# EAGLE board Cowbell (EAGLE 9.3.1)
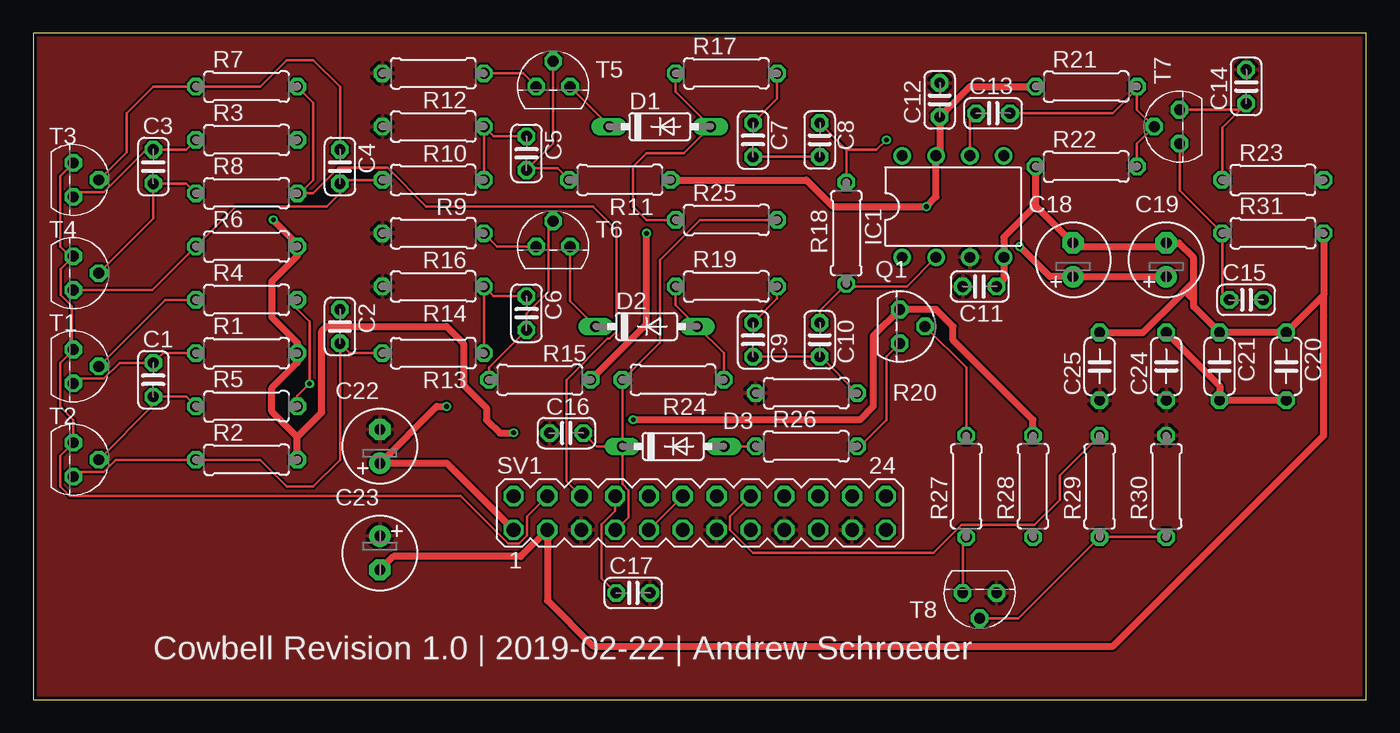
[diagram p0: board, top side]
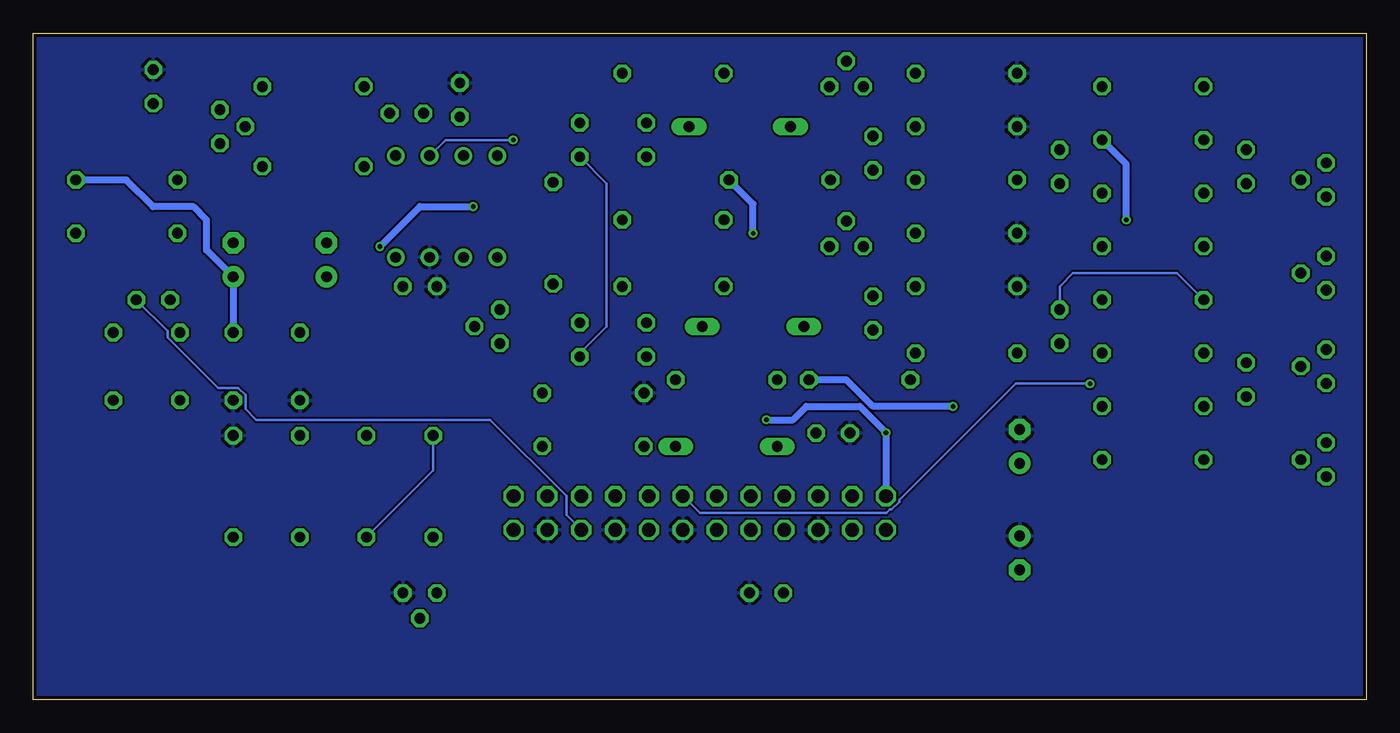
[diagram p1: board, bottom side, seen from below]

Size 100 x 50 mm. Coordinates in mm from the lower left corner, seen from the top.
Outline: 0,0 100,0 100,50 0,50 0,0
Copper layers (1*16): Top 0.035mm / dielectric 1.5mm / Bottom 0.035mm
Design rules "SeeedStudio_2layer_DRU_no_angle_20140221": minimum track width 6mil, minimum drill 12mil, track to track 6mil, track to pad 6mil, pad to pad 6mil, via to via 6mil, smd to smd 0mil, copper to edge 10mil, drill to drill 10mil, minimum pad ring 10mil, minimum via ring 6mil, stop-mask expansion 2mil, vias tented up to drill 100mil, thermal gap 10mil

## Footprints (pad centres in the part's own frame; a part is rotated, then mirrored left to right if it is on the bottom)
C025-024X044 = drill 0.813 octagon: 1 -1.27,0; 2 1.27,0
E2,5-6 = drill 0.813 pad 1.6: + -1.27,0 | drill 0.813 pad 1.6 octagon: - 1.27,0
C050-024X044 = drill 0.813 octagon: 1 -2.54,0; 2 2.54,0
DO35-7 = drill 0.813 long: A 3.81,0; C -3.81,0
DIL08 = drill 0.813 pad 1.27: 1 -3.81,-3.81; 2 -1.27,-3.81; 3 1.27,-3.81; 4 3.81,-3.81; 5 3.81,3.81; 6 1.27,3.81; 7 -1.27,3.81; 8 -3.81,3.81
TO92 = drill 0.813 octagon: 1 1.27,0; 2 0,1.905; 3 -1.27,0
0207/7 = drill 0.813 octagon: 1 -3.81,0; 2 3.81,0
MA12-2 = drill 1.016 octagon: 1 -13.97,-1.27; 2 -13.97,1.27; 3 -11.43,-1.27; 4 -11.43,1.27; 5 -8.89,-1.27; 6 -8.89,1.27; 7 -6.35,-1.27; 8 -6.35,1.27; 9 -3.81,-1.27; 10 -3.81,1.27; 11 -1.27,-1.27; 12 -1.27,1.27; 13 1.27,-1.27; 14 1.27,1.27; 15 3.81,-1.27; 16 3.81,1.27; 17 6.35,-1.27; 18 6.35,1.27; 19 8.89,-1.27; 20 8.89,1.27; 21 11.43,-1.27; 22 11.43,1.27; 23 13.97,-1.27; 24 13.97,1.27

## Placement (x,y rotation side)
C1  0.1u  [C025-024X044]  9,24 270 top
C2  0.1u  [C025-024X044]  23,28 270 top
C3  0.1u  [C025-024X044]  9,40 270 top
C4  0.1u  [C025-024X044]  23,40 270 top
C5  4.7u  [C025-024X044]  37,41 270 top
C6  4.7u  [C025-024X044]  37,29 270 top
C7  2.2p  [C025-024X044]  54,42 270 top
C8  3.3p  [C025-024X044]  59,42 90 top
C9  2.2p  [C025-024X044]  54,27 270 top
C10  0.01u  [C025-024X044]  59,27 90 top
C11  0.1u  [C025-024X044]  71,31 180 top
C12  0.1u  [C025-024X044]  68,45 90 top
C13  2.2u  [C025-024X044]  72,44 0 top
C14  1u  [C025-024X044]  91,46 90 top
C15  2.2u  [C025-024X044]  91,30 0 top
C16  0.47u  [C025-024X044]  40,20 180 top
C17  1u  [C025-024X044]  45,8 0 top
C18  10u  [E2,5-6]  78,33 90 top
C19  10u  [E2,5-6]  85,33 90 top
C20  0.1u  [C050-024X044]  94,25 270 top
C21  0.1u  [C050-024X044]  89,25 270 top
C22  10u  [E2,5-6]  26,19 90 top
C23  10u  [E2,5-6]  26,11 270 top
C24  0.1u  [C050-024X044]  85,25 90 top
C25  0.1u  [C050-024X044]  80,25 270 top
D1  1N4148DO35-7  [DO35-7]  47,43 0 top
D2  1N4148DO35-7  [DO35-7]  46,28 0 top
D3  1N4148DO35-7  [DO35-7]  48,19 0 top
IC1  LM741P  [DIL08]  69,37 0 top
Q1  2N3906  [TO92]  65,28 270 top
R1  470  [0207/7]  16,26 0 top
R2  470  [0207/7]  16,18 0 top
R3  470  [0207/7]  16,42 0 top
R4  12k  [0207/7]  16,30 0 top
R5  12k  [0207/7]  16,22 0 top
R6  470  [0207/7]  16,34 0 top
R7  8.2k  [0207/7]  16,46 0 top
R8  8.2k  [0207/7]  16,38 0 top
R9  33k  [0207/7]  30,39 180 top
R10  1.8k  [0207/7]  30,43 180 top
R11  470k  [0207/7]  44,39 180 top
R12  100  [0207/7]  30,47 180 top
R13  33k  [0207/7]  30,26 180 top
R14  1.8k  [0207/7]  30,31 180 top
R15  470k  [0207/7]  38,24 180 top
R16  100  [0207/7]  30,35 180 top
R17  10k  [0207/7]  52,47 0 top
R18  470k  [0207/7]  61,35 90 top
R19  10k  [0207/7]  52,31 0 top
R20  2.2k  [0207/7]  58,23 0 top
R21  10k  [0207/7]  79,46 180 top
R22  10k  [0207/7]  79,40 0 top
R23  100  [0207/7]  93,39 0 top
R24  100k  [0207/7]  48,24 180 top
R25  100k  [0207/7]  52,36 0 top
R26  1k  [0207/7]  58,19 0 top
R27  22k  [0207/7]  70,16 90 top
R28  4.7k  [0207/7]  75,16 90 top
R29  22k  [0207/7]  80,16 90 top
R30  10k  [0207/7]  85,16 270 top
R31  2.47k  [0207/7]  93,35 180 top
SV1  [MA12-2]  50,14 0 top
T1  2N3904  [TO92]  3,25 270 top
T2  2N3904  [TO92]  3,18 270 top
T3  2N3904  [TO92]  3,39 270 top
T4  2N3904  [TO92]  3,32 270 top
T5  2N3904  [TO92]  39,46 0 top
T6  2N3904  [TO92]  39,34 0 top
T7  2N3904  [TO92]  86,43 90 top
T8  2N3904  [TO92]  71,8 180 top
U$6  [A5L-LOC]  -46,-42 0 top  (outside the outline)

## Library data of the parts
C1-C19 C22 C23 = rcl; SPICEPREFIX: C
C20 C21 C24 C25 = resistor
D1-D3 = diode
IC1 = linear
Q1 = transistor-pnp
R1-R31 = rcl; SPICEPREFIX: R
SV1 = con-lstb; OC_FARNELL: unknown; OC_NEWARK: unknown
T1-T8 = transistor
U$6 = frames

## Nets
+5V: Q1.3 R1.2 R2.2 R3.2 R6.2 R28.2 SV1.2
+12V: C12.1 C18.+ C19.+ C20.2 C21.2 C22.+ C24.2 IC1.7 R11.1 R15.1 R21.2 R23.2 SV1.1
-12V: C11.1 C18.- C19.- C20.1 C21.1 C23.- C25.1 IC1.4 R22.1 R31.1 SV1.3
DGND: SV1.4 T1.3 T2.3 T3.3 T4.3
GND: C11.2 C12.2 C14.2 C16.2 C17.2 C22.- C23.+ C24.1 C25.2 IC1.3 R10.2 R12.2 R14.2 R16.2 R20.1 R30.1 SV1.5 SV1.13 SV1.17 SV1.21 T8.3
N$1: C4.2 R6.1 R9.2 T4.1
N$2: C2.2 R2.1 R13.2 T2.1
N$3: C1.1 R1.1 T1.1
N$4: C2.1 R4.1 T1.2
N$5: C3.1 R3.1 T3.1
N$6: C4.1 R7.1 T3.2
N$7: C1.2 R5.1 T2.2
N$8: C3.2 R8.1 T4.2
N$9: C5.1 R9.1 R10.1
N$10: D1.C T5.1
N$11: C5.2 R11.2 T5.2
N$13: R12.1 T5.3
N$14: C6.1 R13.1 R14.1
N$15: C6.2 R15.2 T6.2
N$16: R16.1 T6.3
N$17: D2.C T6.1
N$18: D1.A R17.1 R25.1
N$19: D2.A R19.1 R24.1
N$20: C7.1 R17.2
N$21: C7.2 C8.1 C9.2 C10.1 R20.2
N$22: C8.2 C13.1 IC1.6 R18.2
N$23: C10.2 IC1.2 R18.1
N$24: SV1.23
N$25: SV1.24
N$26: SV1.22
N$27: C13.2 R21.1 R22.2 T7.2
N$28: C9.1 R19.2
N$29: Q1.1 R26.2
N$30: C14.1 R23.1 T7.1
N$31: C15.1 R31.2 T7.3
N$32: R27.1 T8.1
N$34: D3.A R26.1
N$37: R29.1 R30.2 T8.2
N$39: Q1.2 R27.2 R28.1
OUTPUT: C15.2 SV1.19
POT1: R7.2 R8.2 SV1.6
POT3: C17.1 SV1.8
POT4: C16.1 D3.C R24.2 R25.2 SV1.7
POT5: SV1.10
POT6_7: SV1.9 SV1.12
POT8: SV1.11
POT9: R4.2 R5.2 SV1.14
SW1: SV1.18
SW2: SV1.20
SW3: SV1.15
TRIGGER: R29.2 SV1.16

## Tracks (layer width: path | path; a pad name or v marks a point on that pad's centre or on a via)
+5V  (via drill 0.35)
  Top 0.2: R6.2 19.81,34.19 | 36,20 v36.03,20.03
  Top 0.508: R2.2 19.81,19.71 | 19.81,19.71 17.9,21.62 17.9,23.38 19.81,25.29 R1.2 19.81,26.79 17.9,28.7 17.9,31.38 19.81,33.29 R6.2 | R28.2 75,21 69,27 69,28 67.73,29.27 Q1.3 63,27.27 63,22 62,21 v45,21 | 19.81,34.19 v18,36 | 19.81,19.71 21.65,21.55 21.65,27.67 21.98,28 31,28 32.28,26.72 32.28,23.62 34,21.9 34,21 35,20 36,20
  Bottom 0.508: v45,21 43,21 42,22 38,22 v36.03,20.03 SV1.2 | v18,36 18,40.19 R3.2
+12V  (via drill 0.35)
  Top 0.2: 68,41.08 IC1.7
  Top 0.508: R11.1 58,39 60,37 v67,37 67.73,37.73 IC1.7 | 68,41.08 C12.1 70.27,46 R21.2 | C19.+ C18.+ 76.27,31.73 v74,34 | C24.2 89,23.54 89,23 | 89,23 C21.2 | C20.2 89.54,22.46 89,23 | R15.1 46,28.19 v46,35 | SV1.1 31.03,17.73 C22.+ 30.27,22 v31,22
  Bottom 0.508: v74,34 71,37 v67,37 | v46,35 46,37.19 R11.1 | C24.2 C19.+ 87,33.73 87,36 87.98,36.98 91.01,36.98 93.03,39 R23.2 | v31,22 37,22 39,24 R15.1
-12V
  Top 0.2: 85,34 C19.- | C18.- 78.27,34
  Top 0.508: R31.1 96.81,30.35 | 96.81,30.35 C20.1 C21.1 87.05,29.49 87.05,30 | 87.05,30 87.05,31 | 87.05,31 87.05,31.35 | C19.- 85.95,34.27 87.05,33.17 87.05,32 87.05,31.35 | C25.1 83.24,27.54 85.85,30.15 86.55,30.85 | R22.1 75.19,37.08 | 75.19,37.08 C18.- | 78.27,34 85,34 | 75.19,37.08 72.81,34.7 IC1.4 72.81,31.54 C11.1 | C23.- 27,10.73 36.57,10.73 SV1.3 38.57,7.43 42,4 81,4 96.81,19.81 96.81,30.35 | 86.55,30.85 86.7,31 87.05,31 | 87.05,30 86.55,30.5 86.55,30.85 | 86.55,30.85 87.05,31.35
DGND
  Top 0.2: 2.87,26.14 2,25.27 2,22 3,21 T2.3 2,18.27 2,16 2.73,15.27 32.05,15.27 35.61,11.72 36.45,11.72 37.04,12.31 37.04,13.74 SV1.4 | 2.87,26.14 T1.3 | 2.87,26.14 2.87,29.55 2.04,30.37 2.04,32.31 2.87,33.13 | T4.3 2.87,33.13 | T3.3 2,39.27 2,34 2.87,33.13
GND
  pour Top: -1,51 101,51 101,-1 -1,-1
  pour Bottom: -2,52 102,52 102,-2 -2,-2
N$1
  Top 0.2: T4.1 8.92,30.73 R6.1 15.19,37 22,37 23,38 C4.2 23.27,39 R9.2
N$2
  Top 0.2: T2.1 3.36,17.09 5.28,17.09 6.2,18 R2.1 17,18 19,16 21,16 23,18 C2.2 23.73,26 R13.2
N$3
  Top 0.2: T1.1 3.36,24.09 5.28,24.09 6.47,25.27 C1.1 9.73,26 R1.1
N$4
  Top 0.2: T1.2 9.9,30 R4.1
  Bottom 0.2: R4.1 14.19,32 22,32 23,31 C2.1
N$5
  Top 0.2: T3.1 3.36,38.09 5.28,38.09 8.47,41.27 C3.1 11.46,41.27 R3.1
N$6
  Top 0.2: T3.2 7,41.09 7,44 9,46 R7.1 17,46 19,48 21,48 23,46 C4.1
N$7
  Top 0.2: R5.1 11.46,22.73 C1.2 9,22.09 T2.2
N$8
  Top 0.2: R8.1 11.46,38.73 C3.2 9,36.09 T4.2
N$9
  Top 0.2: C5.1 34.54,42.27 R10.1 R9.1
N$10
  Top 0.2: T5.1 43.19,43.08 D1.C
N$11
  Top 0.2: T5.2 39,41.73 37.13,39.87 | 37.13,39.87 C5.2 | R11.2 39.33,39.87 37.13,39.87
N$13
  Top 0.2: R12.1 36.73,47 T5.3
N$14
  Top 0.2: C6.1 34.54,30.27 R14.1 R13.1
N$15
  Top 0.2: T6.2 38.64,35.55 38.64,30.62 37,28.98 C6.2 34.19,24.92 R15.2
N$16
  Top 0.2: R16.1 34.81,34 T6.3
N$17
  Top 0.2: T6.1 40.27,29.92 D2.C
N$18
  Top 0.2: R17.1 48.19,45.62 D1.A 48.81,41 46,41 45,40 45,37 46,36 R25.1
N$19
  Top 0.2: R19.1 48.19,29.62 D2.A 51.81,26 R24.1
N$20
  Top 0.2: R17.2 55.81,45.08 C7.1
N$21
  Top 0.2: C7.2 C8.1 | R20.2 59.08,25.73 C10.1 C9.2
  Bottom 0.2: C10.1 59,26 57,28 57,38.73 C8.1
N$22  (via drill 0.35)
  Top 0.2: C8.2 61,41.27 | 61,41.27 R18.2 | IC1.6 70.27,43.54 C13.1 | 61,41.27 63.27,41.27 v64,42
  Bottom 0.2: v64,42 69.08,42 IC1.6
N$23
  Top 0.2: IC1.2 65.54,31 61.19,31 R18.1 59,29.19 C10.2
N$27
  Top 0.2: C13.2 81,44 82.81,45.81 R21.1 82.81,44.28 T7.2 82.81,41.72 R22.2
N$28
  Top 0.2: C9.1 55.81,30.08 R19.2
N$29
  Top 0.2: Q1.1 64,25.73 64,21 62,19 R26.2
N$30
  Top 0.2: T7.1 90.54,44.27 C14.1 89.19,42.92 R23.1
N$31
  Top 0.2: T7.3 86,38.19 R31.2 89.19,30.54 C15.1
N$32
  Top 0.2: R27.1 69.73,11.92 T8.1
N$34
  Top 0.2: D3.A R26.1
N$37
  Top 0.2: T8.2 73.91,6.09 R29.1 R30.2
N$39
  Top 0.2: Q1.2 70,24.91 R27.2
  Bottom 0.2: R27.2 70,17.19 R28.1
OUTPUT
  Bottom 0.2: C15.2 89.91,27.64 89.91,27.16 86.12,23.37 84.62,23.37 84.09,22.84 84.09,21.82 83.27,21 65.72,21 60,15.28 60,13.84 SV1.19
POT1
  Top 0.2: R7.2 21,44.81 21,39 20,38 R8.2 20.98,38 22.89,39.91 26.57,39.91 29.48,37 42,37 43.76,35.24 43.76,27.62 43.23,27.09 43.09,27.09 40,24 40,16.38 SV1.6
POT3
  Top 0.2: SV1.8 43.65,14.16 42.64,13.15 42.64,9.09 C17.1
POT4
  Top 0.2: D3.C R24.2 47,26.81 47,33 50,36 R25.2 | C16.1 42.27,19 D3.C | D3.C 44.19,16.16 44.66,15.69 44.66,13.66 43.73,12.73 SV1.7
POT6_7
  Top 0.2: SV1.9 SV1.12
POT9  (via drill 0.35)
  Top 0.2: R5.2 19.81,22.79 v20.72,23.7 20.72,28.38 19.81,29.29 R4.2
  Bottom 0.2: v20.72,23.7 26.3,23.7 35.02,14.98 35.02,14.85 35.61,14.26 35.74,14.26 36,14 50,14 SV1.14
TRIGGER
  Top 0.2: R29.2 77,16.81 77,15 75.1,13.1 69.62,13.1 67.52,11 54,11 52.28,12.72 52.28,13.74 SV1.16

## Text on the board
tNames: Cowbell Revision 1.0 | 2019-02-22 | Andrew Schroeder
Document: REV 1.0 | Andrew Schroeder